# EAGLE board Qwiic_Shield_for_Teensy-Panel (EAGLE 9.6.2), part 1 of 4
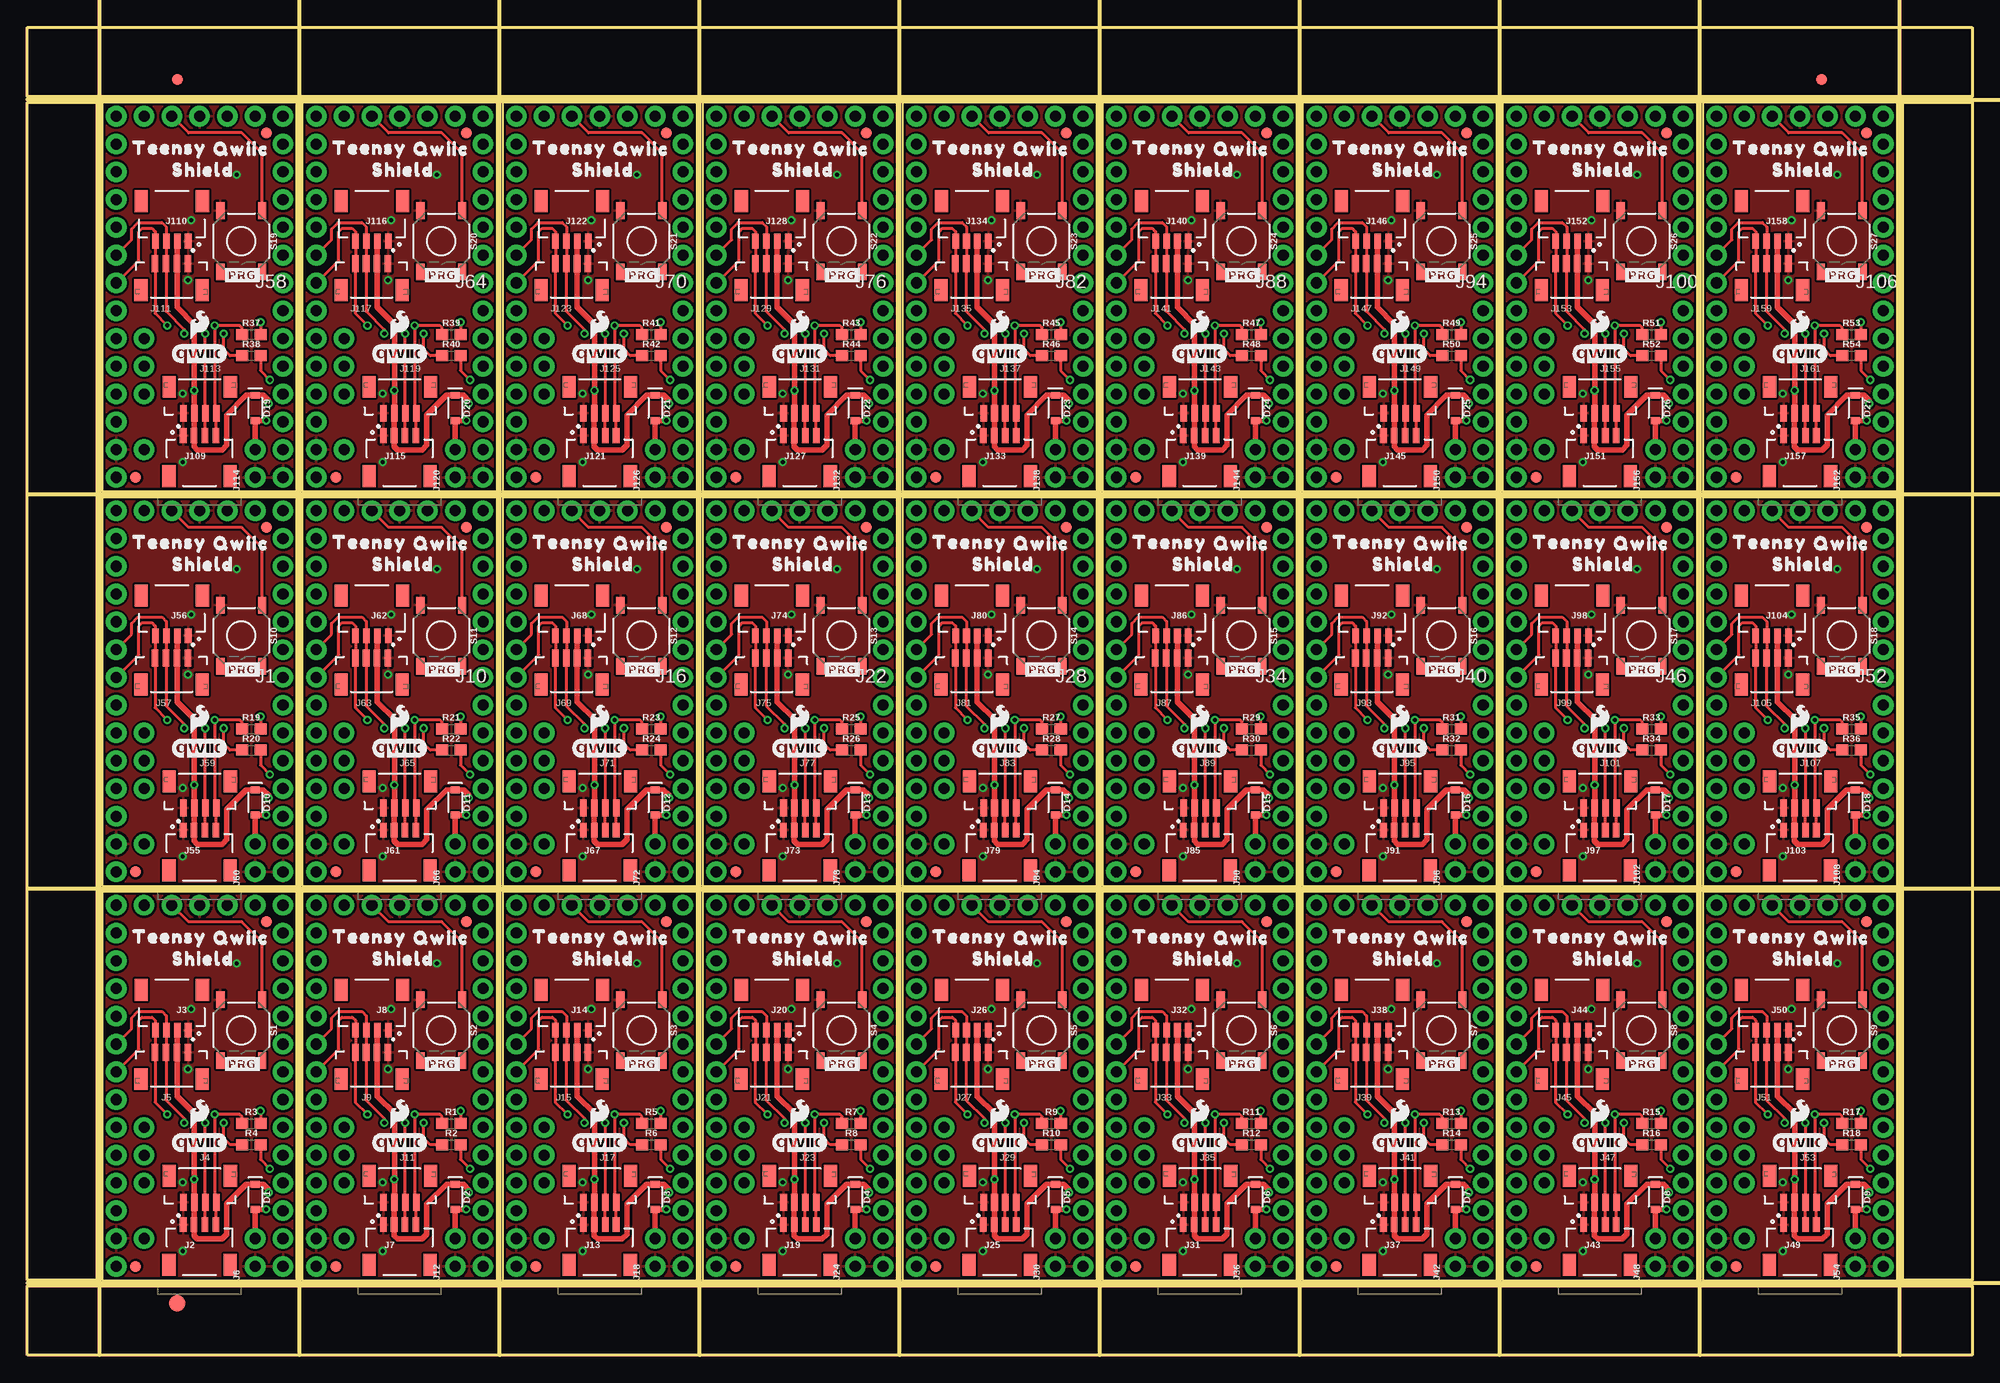
[diagram p0: board, top side]
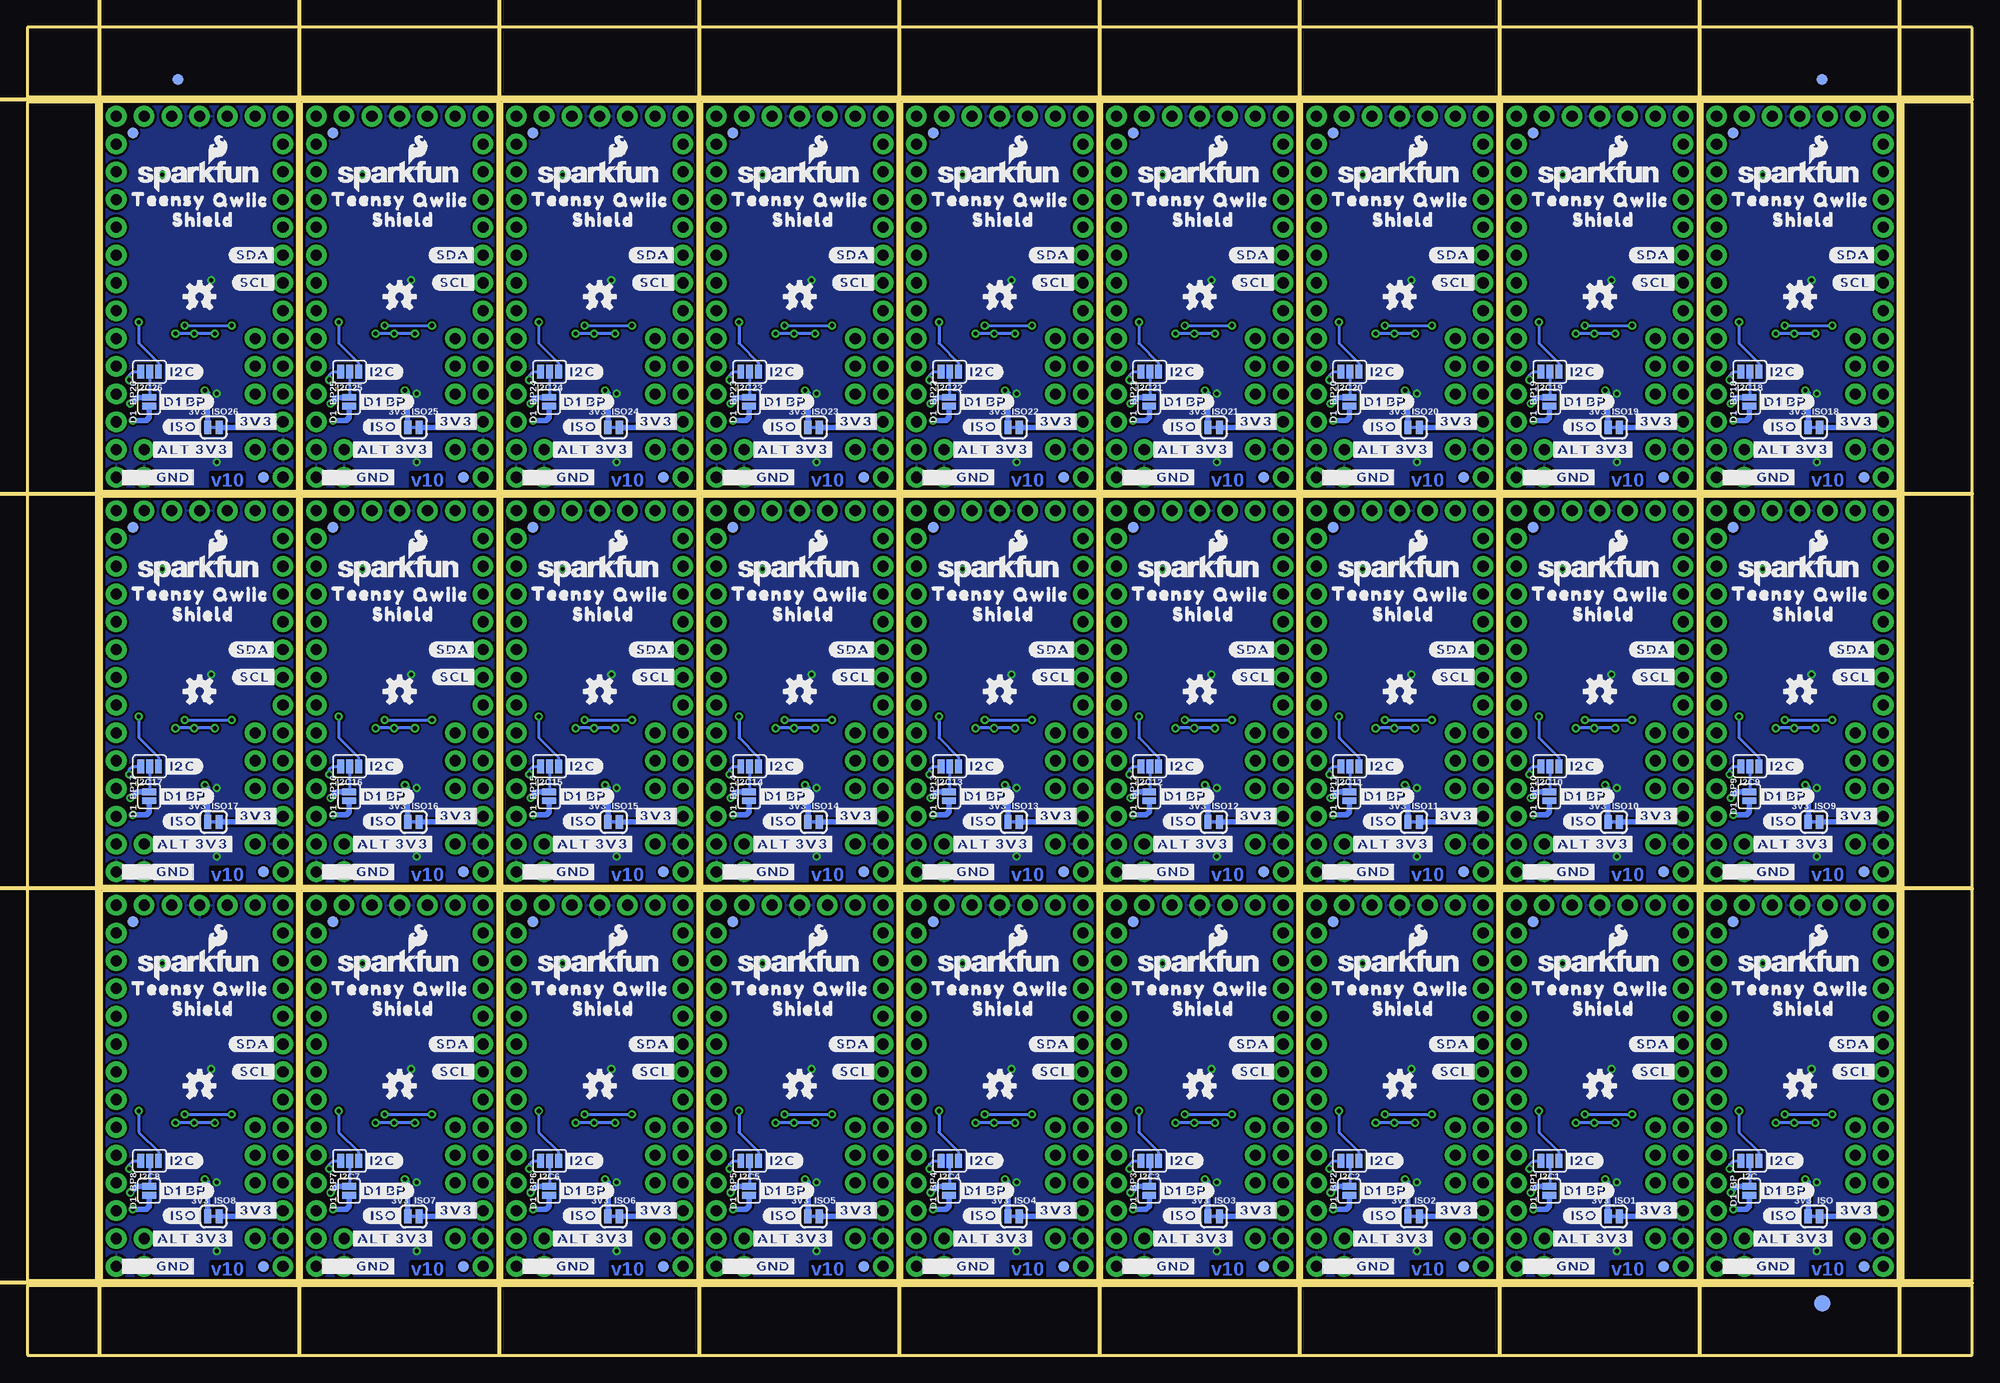
[diagram p1: board, bottom side, seen from below]

Size 177.8 x 121.41 mm. Coordinates in mm from the lower left corner, seen from the top.
Outline: 6.86,6.86 24.64,6.86 24.64,42.42 6.86,42.42 6.86,6.86
Outline: 25.15,6.86 42.93,6.86 42.93,42.42 25.15,42.42 25.15,6.86
Outline: 43.43,6.86 61.21,6.86 61.21,42.42 43.43,42.42 43.43,6.86
Outline: 61.72,6.86 79.5,6.86 79.5,42.42 61.72,42.42 61.72,6.86
Outline: 80.01,6.86 97.79,6.86 97.79,42.42 80.01,42.42 80.01,6.86
Outline: 98.3,6.86 116.08,6.86 116.08,42.42 98.3,42.42 98.3,6.86
Outline: 116.59,6.86 134.37,6.86 134.37,42.42 116.59,42.42 116.59,6.86
Outline: 134.87,6.86 152.65,6.86 152.65,42.42 134.87,42.42 134.87,6.86
Outline: 153.16,6.86 170.94,6.86 170.94,42.42 153.16,42.42 153.16,6.86
Outline: 6.86,42.93 24.64,42.93 24.64,78.49 6.86,78.49 6.86,42.93
Outline: 25.15,42.93 42.93,42.93 42.93,78.49 25.15,78.49 25.15,42.93
Outline: 43.43,42.93 61.21,42.93 61.21,78.49 43.43,78.49 43.43,42.93
Outline: 61.72,42.93 79.5,42.93 79.5,78.49 61.72,78.49 61.72,42.93
Outline: 80.01,42.93 97.79,42.93 97.79,78.49 80.01,78.49 80.01,42.93
Outline: 98.3,42.93 116.08,42.93 116.08,78.49 98.3,78.49 98.3,42.93
Outline: 116.59,42.93 134.37,42.93 134.37,78.49 116.59,78.49 116.59,42.93
Outline: 134.87,42.93 152.65,42.93 152.65,78.49 134.87,78.49 134.87,42.93
Outline: 153.16,42.93 170.94,42.93 170.94,78.49 153.16,78.49 153.16,42.93
Outline: 6.86,78.99 24.64,78.99 24.64,114.55 6.86,114.55 6.86,78.99
Outline: 25.15,78.99 42.93,78.99 42.93,114.55 25.15,114.55 25.15,78.99
Outline: 43.43,78.99 61.21,78.99 61.21,114.55 43.43,114.55 43.43,78.99
Outline: 61.72,78.99 79.5,78.99 79.5,114.55 61.72,114.55 61.72,78.99
Outline: 80.01,78.99 97.79,78.99 97.79,114.55 80.01,114.55 80.01,78.99
Outline: 98.3,78.99 116.08,78.99 116.08,114.55 98.3,114.55 98.3,78.99
Outline: 116.59,78.99 134.37,78.99 134.37,114.55 116.59,114.55 116.59,78.99
Outline: 134.87,78.99 152.65,78.99 152.65,114.55 134.87,114.55 134.87,78.99
Outline: 153.16,78.99 170.94,78.99 170.94,114.55 153.16,114.55 153.16,78.99
Outline: 0,6.35 177.8,6.35 177.8,0 0,0 0,6.35
Outline: 171.45,114.55 177.8,114.55 177.8,6.86 171.45,6.86 171.45,114.55
Outline: 0,121.41 177.8,121.41 177.8,115.06 0,115.06 0,121.41
Outline: 0,114.55 6.35,114.55 6.35,6.86 0,6.86 0,114.55
Copper layers (1*16): Top 0.035mm / dielectric 1.5mm / Bottom 0.035mm
Design rules "Qwiic_Shield_for_Teensy": minimum track width 7mil, minimum drill 15mil, track to track 7mil, track to pad 7mil, pad to pad 7mil, via to via 7mil, smd to smd 7mil, copper to edge 7mil, drill to drill 7mil, minimum pad ring 7mil, minimum via ring 7mil, stop-mask expansion 4mil, vias tented up to drill 25mil, thermal gap 10mil
Milling: 14 lines

## Footprints (pad centres in the part's own frame; a part is rotated, then mirrored left to right if it is on the bottom)
SMT-JUMPER_2_NC_TRACE_SILK = smd 0.66 x 1.27: 1 -0.521,0; 2 0.521,0
SOD-323 = smd 0.63 x 0.83: A 1.15,0; C -1.15,0
SMT-JUMPER_2_NO_SILK = smd 0.635 x 1.27: 1 -0.406,0; 2 0.406,0
FIDUCIAL-1X2 = smd 1 x 1: 1 0,0
FIDUCIAL-1.5X3 = smd 1.5 x 1.5: 1 0,0
SMT-JUMPER_3_NO_SILK = smd 0.635 x 1.27: 1 -0.813,0; 2 0,0; 3 0.813,0
TEENSY_NOSILK = drill 1.016 pad 1.88: 0 7.62,-13.97; 1 7.62,-11.43; 2 7.62,-8.89; 3 7.62,-6.35; 3.3V 2.54,16.51; 3V -7.62,-11.43; 4 7.62,-3.81; 5 7.62,-1.27; 6 7.62,1.27; 7 7.62,3.81; 8 7.62,6.35; 9 7.62,8.89; 10 7.62,11.43; 11 7.62,13.97; 12 7.62,16.51; 13 -7.62,16.51; 14 -7.62,13.97; 15 -7.62,11.43; 16 -7.62,8.89; 17 -7.62,6.35; 18 -7.62,3.81; 19 -7.62,1.27; 20 -7.62,-1.27; 21 -7.62,-3.81; 22 -7.62,-6.35; 23 -7.62,-8.89; A10 -5.08,-6.35; A11 -5.08,-3.81; A14/DAC -5.08,16.51; AGND -7.62,-13.97; AREF -5.08,-8.89; GND 0,16.51; GND1 7.62,-16.51; PROG -2.54,16.51; VBAT 5.08,16.51; VIN -7.62,-16.51; VUSB -5.08,-13.97
JST04_1MM_RA = smd 0.6 x 1.35: 1 -1.5,0; 2 -0.5,0; 3 0.5,0; 4 1.5,0 | smd 1.2 x 2: NC1 2.8,-3.675; NC2 -2.8,-3.675
JST04_1MM_VERT = smd 0.6 x 1.55: 1 -1.478,0.775; 2 -0.478,0.775; 3 0.522,0.775; 4 1.522,0.775 | smd 1.2 x 2: NC1 -2.778,3.2; NC2 2.822,3.2
1X02_NO_SILK = drill 1.016 pad 1.88: 1 0,0; 2 2.54,0
0603 = smd 1.1 x 1: 1 -0.85,0; 2 0.85,0
TACTILE_SWITCH_SMD_5.2MM = smd 1.524 x 0.762: 1 -2.794,1.905; 2 2.794,1.905; 3 -2.794,-1.905; 4 2.794,-1.905